# EAGLE board VisualightMicroBulb_041_QFN (EAGLE 6.2)
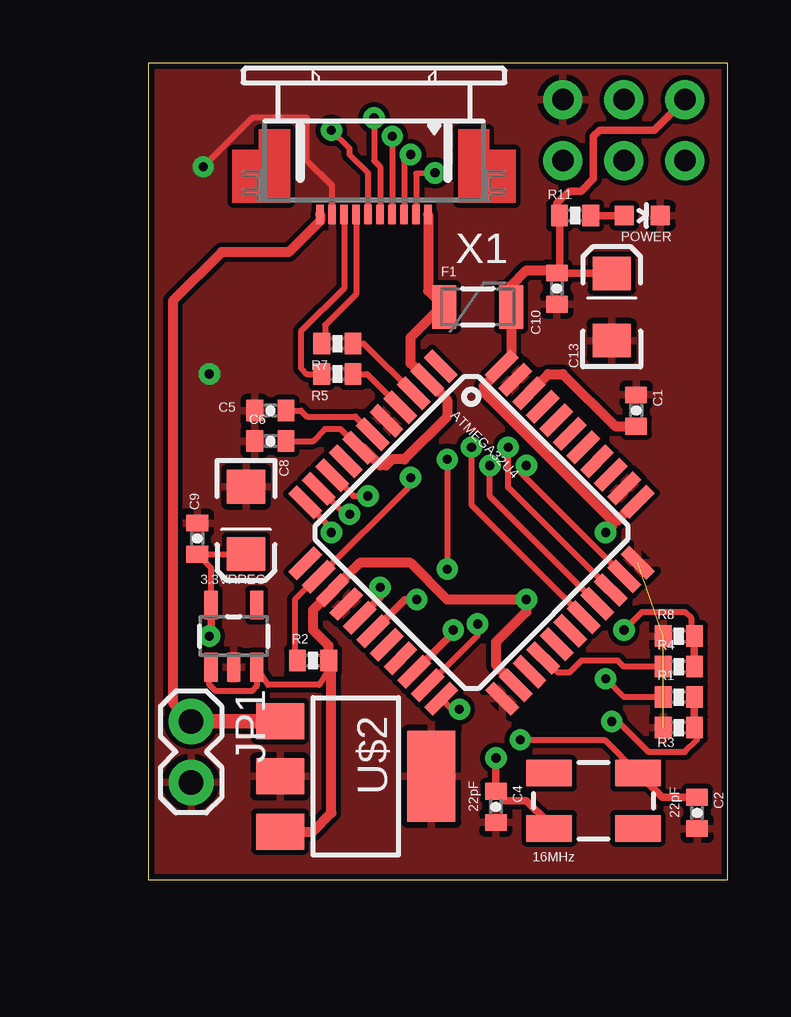
[diagram p0: board, top side]
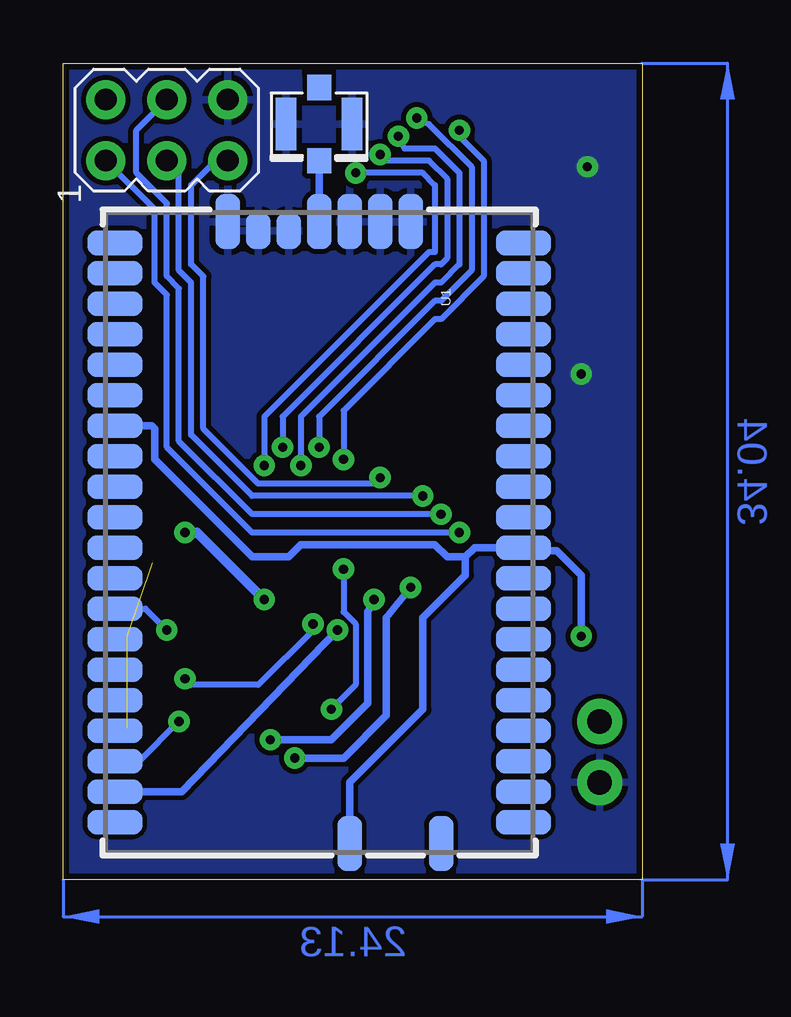
[diagram p1: board, bottom side, seen from below]

Size 24.13 x 34.04 mm. Coordinates in mm from the lower left corner, seen from the top.
Outline: 0,34.04 0,0 24.13,0 24.13,34.04 0,34.04
Copper layers (1*16): Top 0.035mm / dielectric 1.5mm / Bottom 0.035mm
Design rules: minimum track width 8mil, minimum drill 15mil, track to track 8mil, track to pad 8mil, pad to pad 8mil, via to via 8mil, smd to smd 8mil, copper to edge 10mil, drill to drill 8mil, minimum pad ring 12mil, minimum via ring 10mil, stop-mask expansion 4mil, vias tented up to drill 25mil, thermal gap 10mil
Net classes: 0 default: width 0.003 mm, drill 0.381 mm, clearance 0.152 mm

## Footprints (pad centres in the part's own frame; a part is rotated, then mirrored left to right if it is on the bottom)
SOT23-5 = smd 0.55 x 1.2: 1 -0.95,-1.3; 2 0,-1.3; 3 0.95,-1.3; 4 0.95,1.3; 5 -0.95,1.3
SPARKFUN-DIGITALIC_TQFP44 = smd 1.5 x 0.5: 1 -5.8,4; 2 -5.8,3.2; 3 -5.8,2.4; 4 -5.8,1.6; 5 -5.8,0.8; 6 -5.8,0; 7 -5.8,-0.8; 8 -5.8,-1.6; 9 -5.8,-2.4; 10 -5.8,-3.2; 11 -5.8,-4; 23 5.8,-4; 24 5.8,-3.2; 25 5.8,-2.4; 26 5.8,-1.6; 27 5.8,-0.8; 28 5.8,0; 29 5.8,0.8; 30 5.8,1.6; 31 5.8,2.4; 32 5.8,3.2; 33 5.8,4 | smd 0.5 x 1.5: 12 -4,-5.8; 13 -3.2,-5.8; 14 -2.4,-5.8; 15 -1.6,-5.8; 16 -0.8,-5.8; 17 0,-5.8; 18 0.8,-5.8; 19 1.6,-5.8; 20 2.4,-5.8; 21 3.2,-5.8; 22 4,-5.8; 34 4,5.8; 35 3.2,5.8; 36 2.4,5.8; 37 1.6,5.8; 38 0.8,5.8; 39 0,5.8; 40 -0.8,5.8; 41 -1.6,5.8; 42 -2.4,5.8; 43 -3.2,5.8; 44 -4,5.8
0402-CAP = smd 0.7 x 0.9: 1 -0.65,0; 2 0.65,0
EIA3216 = smd 1.4 x 1.6: A 1.4,0; C -1.4,0
PTC-1206 = smd 1 x 1.8: 1 -1.4,0; 2 1.4,0
AVRISP = drill 0.9 pad 1.626: 1 -1.27,2.54; 2 1.27,2.54; 3 -1.27,0; 4 1.27,0; 5 -1.27,-2.54; 6 1.27,-2.54
1X02 = drill 1.016 pad 1.88: 1 0,0; 2 2.54,0
LED-0603 = smd 0.8 x 0.8: A 0,-0.75; C 0,0.75
0402-RES = smd 0.7 x 0.9: 1 -0.65,0; 2 0.65,0
RN171 = smd 1.016 x 2.286: 1 12.065,8.509; 2 10.795,8.509; 3 9.525,8.509; 4 8.255,8.509; 5 6.985,8.509; 6 5.715,8.509; 7 4.445,8.509; 8 3.175,8.509; 9 1.905,8.509; 10 0.635,8.509; 11 -0.635,8.509; 12 -1.905,8.509; 13 -3.175,8.509; 14 -4.445,8.509; 15 -5.715,8.509; 16 -6.985,8.509; 17 -8.255,8.509; 18 -9.525,8.509; 19 -10.795,8.509; 20 -12.065,8.509; 28 -12.065,-8.509; 29 -10.795,-8.509; 30 -9.525,-8.509; 31 -8.255,-8.509; 32 -6.985,-8.509; 33 -5.715,-8.509; 34 -4.445,-8.509; 35 -3.175,-8.509; 36 -1.905,-8.509; 37 -0.635,-8.509; 38 0.635,-8.509; 39 1.905,-8.509; 40 3.175,-8.509; 41 4.445,-8.509; 42 5.715,-8.509; 43 6.985,-8.509; 44 8.255,-8.509; 45 9.525,-8.509; 46 10.795,-8.509; 47 12.065,-8.509 | smd 2.286 x 1.016: 21 -12.954,3.81; 22 -12.954,2.54; 23 -12.954,1.27; 24 -12.954,0; 27 -12.954,-3.81; 48 12.954,5.08; 49 12.954,1.27 | smd 1.524 x 1.016: 25 -12.573,-1.27; 26 -12.573,-2.54
U.FL = smd 2.2 x 0.85: P$1 0,1.375; P$2 0,-1.375 | smd 1.05 x 1: P$3 1.525,0; P$4 -1.525,0
SOT223 = smd 1.5 x 2: 1 -2.3,-3.15; 2 0,-3.15; 3 2.3,-3.15 | smd 3.8 x 2: 4 0,3.15
52745-1090 = smd 0.3 x 0.8: 1 -2.25,2.5; 2 -1.75,2.5; 3 -1.25,2.5; 4 -0.75,2.5; 5 -0.25,2.5; 6 0.25,2.5; 7 0.75,2.5; 8 1.25,2.5; 9 1.75,2.5; 10 2.25,2.5
CRYSTAL-SMD-5X3 = smd 1.9 x 1.1: 1 -1.85,-1.15; 2 1.85,-1.15; 3 1.85,1.15; 4 -1.85,1.15

## Placement (x,y rotation side)
3.3VRREG  MIC5219 3.3V  [SOT23-5]  3.56,10.16 0 top
ATMEGA32U4  ATMEGA32U4  [SPARKFUN-DIGITALIC_TQFP44]  13.46,14.48 315.1 top
C1  0.1uF  [0402-CAP]  20.32,19.56 270 top
C2  22pF  [0402-CAP]  22.86,2.79 270 top
C4  22pF  [0402-CAP]  14.48,3.05 270 top
C5  1uF  [0402-CAP]  5.08,19.56 0 top
C6  1uF  [0402-CAP]  5.08,18.29 0 top
C8  10uF  [EIA3216]  4.06,14.99 270 top
C9  0.1uF  [0402-CAP]  2.03,14.22 270 top
C10  1uF  [0402-CAP]  17.02,24.64 270 top
C13  10uF  [EIA3216]  19.3,23.88 90 top
F1  500mA  [PTC-1206]  13.72,23.88 0 top
ISP1  AVRISP-6  [AVRISP]  19.81,31.24 90 bottom
JP1  [1X02]  1.78,6.6 270 top
POWER  Red  [LED-0603]  20.57,27.69 270 top
R1  2.2K  [0402-RES]  22.1,7.62 0 top
R2  10K  [0402-RES]  6.86,9.14 0 top
R3  3.3K  [0402-RES]  22.1,6.35 0 top
R4  2.2K  [0402-RES]  22.1,8.89 0 top
R5  22  [0402-RES]  7.87,21.08 180 top
R7  22  [0402-RES]  7.87,22.35 180 top
R8  3.3K  [0402-RES]  22.1,10.16 0 top
R11  1K  [0402-RES]  17.78,27.69 180 top
U1  RN171RN171  [RN171]  13.46,14.48 270 bottom
U$1  U.FL  [U.FL]  13.46,31.5 270 bottom
U$2  MIC5239  [SOT223]  8.64,4.32 270 top
X1  52745-1090  [52745-1090]  9.4,30.23 180 top
Y1  16MHz  [CRYSTAL-SMD-5X3]  18.54,3.3 0 top

## Library data of the parts
3.3VRREG = SparkFun-PowerIC; PROD_ID: VREG-09872
ATMEGA32U4 = SparkFun-DigitalIC
C1 C2 C4-C6 C8-C10 C13 F1 POWER R1-R5 R7 R8 R11 Y1 = SparkFun
ISP1 = adafruit
JP1 U$1 = SparkFun-Connectors
U1 = SparkFun-RF
U$2 = v-reg
X1 = con-molex; MPN: 52745-1090; OC_FARNELL: unknown; OC_NEWARK: 92M6380

## Nets
+3V3_OUT: 3.3VRREG.5 C8.A C9.2 U1.10 U1.34 U1.49
A0: ATMEGA32U4.36
A1: ATMEGA32U4.37
A2: ATMEGA32U4.38
A3: ATMEGA32U4.39
A4: ATMEGA32U4.40
A5: ATMEGA32U4.41
ANT: U1.24 U$1.P$3
AREF: ATMEGA32U4.42 C1.2
D2: ATMEGA32U4.19
D3: ATMEGA32U4.18
D4: ATMEGA32U4.25
D5: ATMEGA32U4.31 X1.3
D6: ATMEGA32U4.27
D7: ATMEGA32U4.1
D8: ATMEGA32U4.28
D9: ATMEGA32U4.29 X1.5
D10: ATMEGA32U4.30 X1.4
D11: ATMEGA32U4.12
D12: ATMEGA32U4.26 R4.1
D13: ATMEGA32U4.32 X1.2
D17: ATMEGA32U4.8
D+: ATMEGA32U4.4 R5.1
D+IN: R7.2 X1.7
D-: ATMEGA32U4.3 R7.1
D-IN: R5.2 X1.8
GND [vcc]: 3.3VRREG.2 ATMEGA32U4.5 ATMEGA32U4.15 ATMEGA32U4.23 ATMEGA32U4.33 ATMEGA32U4.35 ATMEGA32U4.43 C1.1 C2.2 C4.2 C5.1 C6.1 C8.C C9.1 C10.2 C13.C ISP1.6 JP1.2 POWER.C R3.1 R8.1 U1.21 U1.22 U1.23 U1.25 U1.26 U1.27 U$1.P$1 U$1.P$2 U$2.2 U$2.4 X1.9
MISO: ATMEGA32U4.11 ISP1.1
MOSI: ATMEGA32U4.10 ISP1.4
N$1: ATMEGA32U4.16 C4.1 Y1.1
N$2: ATMEGA32U4.17 C2.1 Y1.3
N$4: ATMEGA32U4.6 C5.2
N$38: POWER.A R11.1
RAW: JP1.1 U$2.1 X1.10
RESET: ATMEGA32U4.13 ISP1.5 R2.1
SCK: ATMEGA32U4.9 ISP1.3
TX: ATMEGA32U4.21 R1.1
TXLED: ATMEGA32U4.22 X1.6
UVCC: ATMEGA32U4.2 ATMEGA32U4.7 C6.2 F1.1 X1.1
VCC: 3.3VRREG.1 3.3VRREG.3 ATMEGA32U4.14 ATMEGA32U4.24 ATMEGA32U4.34 ATMEGA32U4.44 C10.1 C13.A F1.2 ISP1.2 R2.2 R11.2 U$2.3
WIFIDIN: R1.2 R3.2 U1.45
WIFIDOUT: ATMEGA32U4.20 U1.46
WIFIRESET: R4.2 R8.2 U1.40

## Tracks (layer width: path | path; a pad name or v marks a point on that pad's centre or on a via)
+3V3_OUT  (via drill 0.38)
  Top 0.254: 3.3VRREG.5 2.61,13 C9.2 4.05,13.57 C8.A
  Top 0.305: 3.3VRREG.5 2.61,10.23 v2.54,10.16
  Bottom 0.305: v2.54,10.16 2.54,12.7 3.56,13.72 4.83,13.72 U1.10 6.98,13.84 7.37,13.46 | 7.37,13.46 8.13,13.46 8.64,13.97 14.22,13.97 14.73,13.46 16.26,13.46 20.32,17.53 20.32,18.8 20.45,18.92 U1.34 | U1.49 12.19,4.06 9.14,7.11 9.14,10.92 7.37,12.7 7.37,13.46
ANT
  Bottom 0.305: U1.24 U$1.P$3
AREF
  Top 0.406: ATMEGA32U4.42 16.66,21.08 17.27,21.08 19.45,18.91 C1.2
D2
  Top 0.406: ATMEGA32U4.19
D5  (via drill 0.38)
  Top 0.254: ATMEGA32U4.31 14.99,16.36 v14.99,18.03 | v10.92,30.23 10.65,29.95 X1.3
  Bottom 0.254: v10.92,30.23 10.67,29.97 8.89,29.97 8.13,29.21 8.13,25.91 8.38,25.65 8.64,25.65 14.99,19.3 v14.99,18.03
D9  (via drill 0.38)
  Top 0.254: ATMEGA32U4.29 13.46,15.62 v13.46,18.03 | v9.4,31.75 9.4,29.97 9.65,29.72 X1.5
  Bottom 0.254: v9.4,31.75 8.89,31.5 7.11,29.72 7.11,25.4 8.38,24.13 8.64,24.13 13.46,19.3 v13.46,18.03
D10  (via drill 0.38)
  Top 0.254: ATMEGA32U4.30 14.22,15.99 v14.22,17.27 | v10.16,30.99 10.15,30.72 X1.4
  Bottom 0.254: v10.16,30.99 9.91,30.48 8.64,30.48 7.62,29.46 7.62,25.65 8.38,24.89 8.64,24.89 14.22,19.3 v14.22,17.27
D12
  Top 0.254: R4.1 19.81,8.89 19.56,9.14 18.03,9.14 17.53,8.64 17.06,8.64 ATMEGA32U4.26
D13  (via drill 0.38)
  Top 0.254: ATMEGA32U4.32 15.49,16.99 15.49,17.27 v15.75,17.27 | v11.94,29.46 11.15,29.44 X1.2
  Bottom 0.254: v11.94,29.46 9.14,29.46 8.64,28.96 8.64,26.16 8.89,26.16 15.75,19.3 v15.75,17.27
D+
  Top 0.254: R5.1 9.11,21.08 ATMEGA32U4.4
D+IN
  Top 0.254: X1.7 8.65,24.4 7.37,23.11 7.37,22.49 R7.2
D-
  Top 0.254: R7.1 8.97,22.35 ATMEGA32U4.3
D-IN
  Top 0.254: X1.8 8.15,24.66 6.35,22.86 6.35,21.34 6.6,21.08 R5.2
GND  (via drill 0.38)  (2 unrouted)
  Top 0.254: X1.9 7.65,28.93 6.6,29.97 6.6,31.75 4.32,31.75 v2.29,29.72
  other vias: 2.54,21.08
  pour Bottom: 24.13,0 0,0 0,34.04 24.13,34.04
  pour Top: 24.13,0 0,0 0,34.04 24.13,34.04
MISO  (via drill 0.38 pad 0.25)
  Top 0.254: ATMEGA32U4.11 7.37,14.9 v7.62,14.48
  Bottom 0.254: ISP1.1 20.32,27.94 20.32,24.89 19.81,24.38 19.81,18.03 16.26,14.48 v7.62,14.48
MOSI  (via drill 0.38 pad 0.25)
  Top 0.254: ATMEGA32U4.10 8.13,15.27 v8.38,15.24
  Bottom 0.254: v8.38,15.24 16.26,15.24 19.3,18.29 19.3,24.64 19.81,25.15 19.81,28.19 21.08,29.46 21.08,31.24 ISP1.4
N$1  (via drill 0.38)
  Top 0.305: ATMEGA32U4.16 9.65,11.79 v9.65,12.19 | v14.48,5.08 C4.1 14.87,3.3 15.75,3.3 16.69,2.36 Y1.1
  Bottom 0.305: v9.65,12.19 10.67,10.92 10.67,6.86 12.45,5.08 v14.48,5.08
N$2  (via drill 0.38)
  Top 0.254: v15.49,5.84 19,5.84 Y1.3
  Top 0.305: ATMEGA32U4.17 10.68,11.68 v11.18,11.68 | Y1.3 21.4,3.44 C2.1
  Bottom 0.305: v11.18,11.68 11.43,11.18 11.43,7.37 12.95,5.84 v15.49,5.84
N$4
  Top 0.254: C5.2 6.35,19.56 6.6,19.3 8.62,19.3 ATMEGA32U4.6
N$38
  Top 0.305: R11.1 POWER.A
RAW
  Top 0.406: X1.10 7.15,27.47 5.84,26.16 3.05,26.16 1.02,24.13 1.02,7.37 JP1.1
  Top 0.61: JP1.1 5.47,6.6 U$2.1
RESET  (via drill 0.38 pad 0.25)
  Top 0.254: v10.92,16.76 10.92,16.45 ATMEGA32U4.13 7.04,12.63 6.1,11.68 6.1,9.26 R2.1
  Bottom 0.254: v10.92,16.76 11.18,16.51 16,16.51 18.29,18.8 18.29,25.15 18.8,25.65 18.8,28.96 17.78,29.97 ISP1.5
SCK  (via drill 0.38 pad 0.64)
  Top 0.254: ATMEGA32U4.9 8.53,16 v9.14,16
  Bottom 0.254: v9.14,16 16.26,16 18.8,18.54 18.8,24.89 19.3,25.4 19.3,29.46 ISP1.3
TX  (via drill 0.38)
  Top 0.254: ATMEGA32U4.21 13.72,10.19 v13.72,10.67 | R1.1 19.81,7.62 v19.05,8.38
  Bottom 0.254: v13.72,10.67 13.72,10.41 16,8.13 18.8,8.13 v19.05,8.38
TXLED  (via drill 0.38)
  Top 0.254: X1.6 9.15,29.46 8.38,30.23 8.38,30.48 v7.62,31.24 | v12.45,17.53 v12.45,12.95 | v12.95,7.11 12.63,7.11 ATMEGA32U4.22
  Bottom 0.254: v12.45,12.95 12.45,11.18 11.94,10.67 11.94,8.13 v12.95,7.11 | v7.62,31.24 7.62,30.99 6.6,29.97 6.6,25.15 8.38,23.37 8.64,23.37 12.45,19.56 v12.45,17.53
UVCC
  Top 0.254: C6.2 6.86,18.29 7.37,18.8 8,18.8 ATMEGA32U4.7
  Top 0.406: ATMEGA32U4.7 8.92,18.01 9.65,17.27 9.91,17.27 10.16,17.53 10.67,17.53 12.45,19.3 12.45,20.01 ATMEGA32U4.2 10.92,21.53 10.92,22.61 12.19,23.88 F1.1 11.65,24.54 X1.1
VCC  (via drill 0.38)
  Top 0.254: R2.2 7.51,8.78 7.11,8.13 4.98,8.13 3.3VRREG.3 4.51,8.06 4.32,7.87 2.79,7.87 2.54,8.13 2.54,8.79 3.3VRREG.1 | 14.22,20.83 14.22,20.91 ATMEGA32U4.44
  Top 0.305: ISP1.2 21.08,31.24 18.8,31.24 18.54,30.99 18.54,29.21 18.03,28.7 17.53,28.7 17.02,28.19 17.02,27.8 R11.2 17.13,25.4 C10.1 19.29,25.29 C13.A
  Top 0.406: 14.72,21.33 ATMEGA32U4.44 15.12,21.8 F1.2 15.12,24.77 15.75,25.4 16.91,25.4 C10.1 | 19.3,14.99 13.97,20.32 13.97,20.57 14.22,20.83 | 19.3,14.99 19.56,14.99 20.34,15.76 ATMEGA32U4.34 | 7.75,12.06 ATMEGA32U4.14 | U$2.3 6.84,2.02 7.62,2.79 7.62,9.03 R2.2 7.51,9.76 6.86,10.41 6.86,11.25 ATMEGA32U4.14 | 19.3,14.99 19.3,14.73 v19.05,14.48 | ATMEGA32U4.24 14.48,8.95 14.48,9.91 15.75,11.18 v15.75,11.68 12.45,11.68 10.92,13.21 8.81,13.21 ATMEGA32U4.14
  Bottom 0.406: v19.05,14.48 18.54,14.48 v15.75,11.68
WIFIDIN  (via drill 0.38)
  Top 0.254: v19.3,6.6 19.56,6.6 20.83,5.33 22.35,5.33 22.86,5.84 22.86,6.24 R3.2
  Top 0.305: R3.2 R1.2
  Bottom 0.254: U1.45 20.95,4.95 v19.3,6.6
WIFIDOUT  (via drill 0.38)
  Top 0.305: ATMEGA32U4.20 12.55,10.16 v12.7,10.41
  Bottom 0.305: v12.7,10.41 19.18,3.68 U1.46
WIFIRESET  (via drill 0.38)
  Top 0.254: v19.81,10.41 20.57,11.18 22.35,11.18 22.61,10.92 22.61,10.3 R8.2
  Top 0.305: R4.2 R8.2
  Bottom 0.254: U1.40 20.7,11.3 v19.81,10.41
(copper drawn outside any net)
  shapes: Bottom area x2